# EAGLE board master (EAGLE 8.4.0)
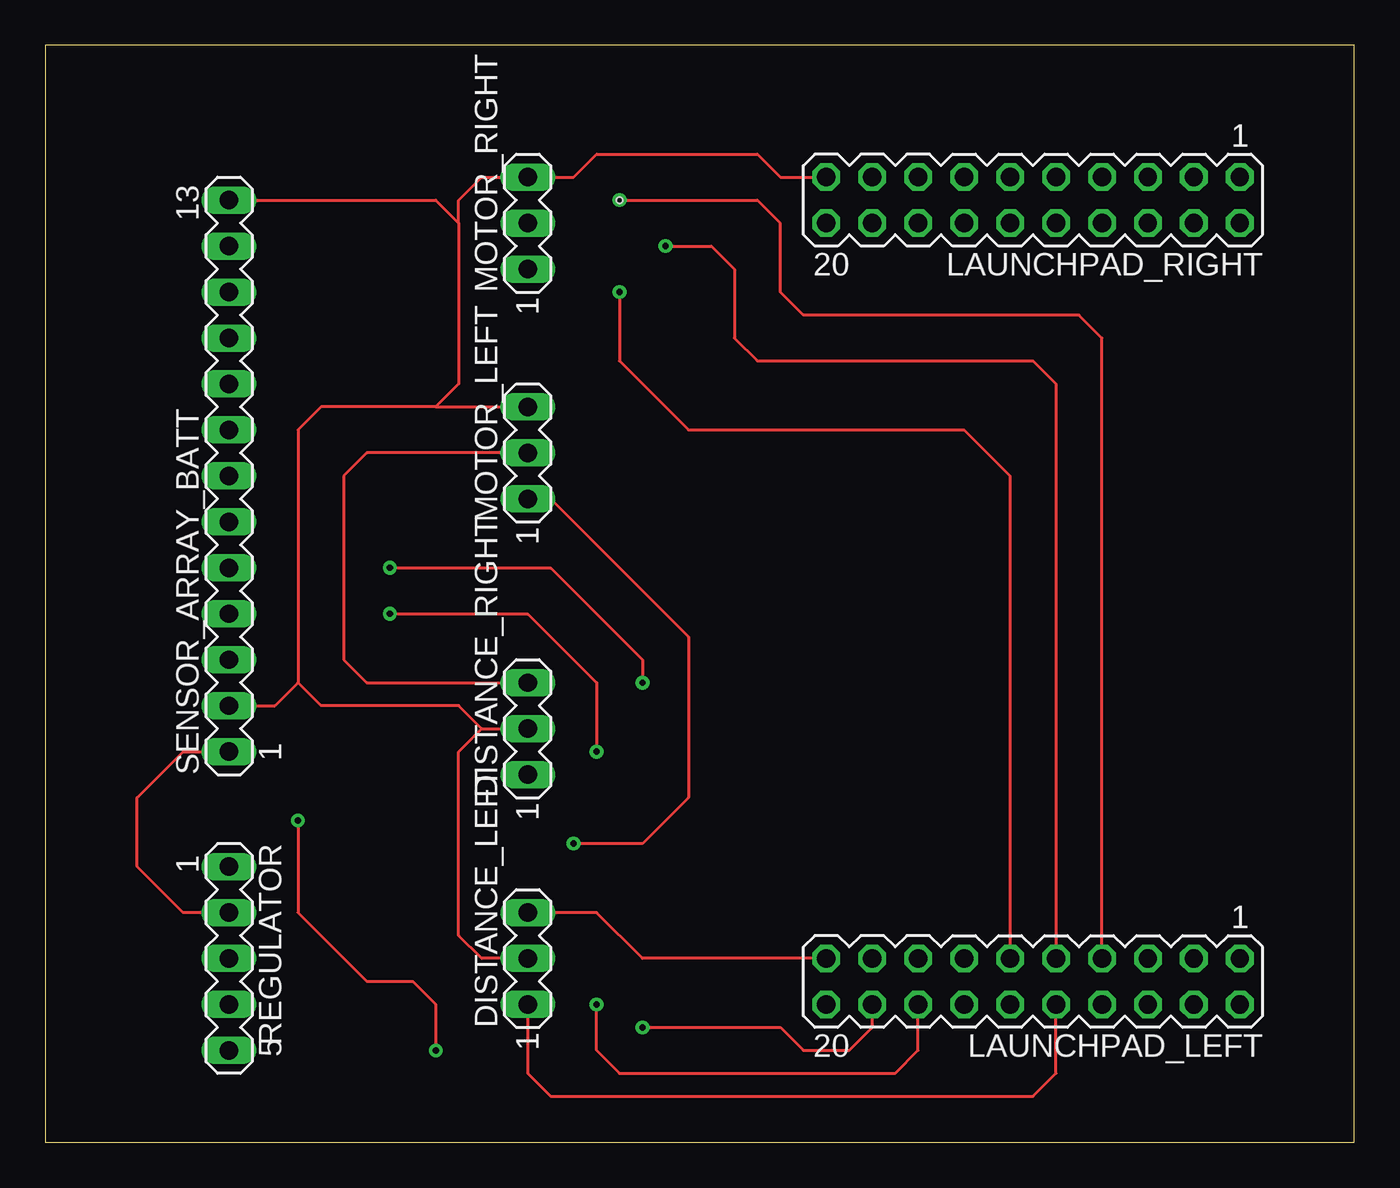
[diagram p0: board, top side]
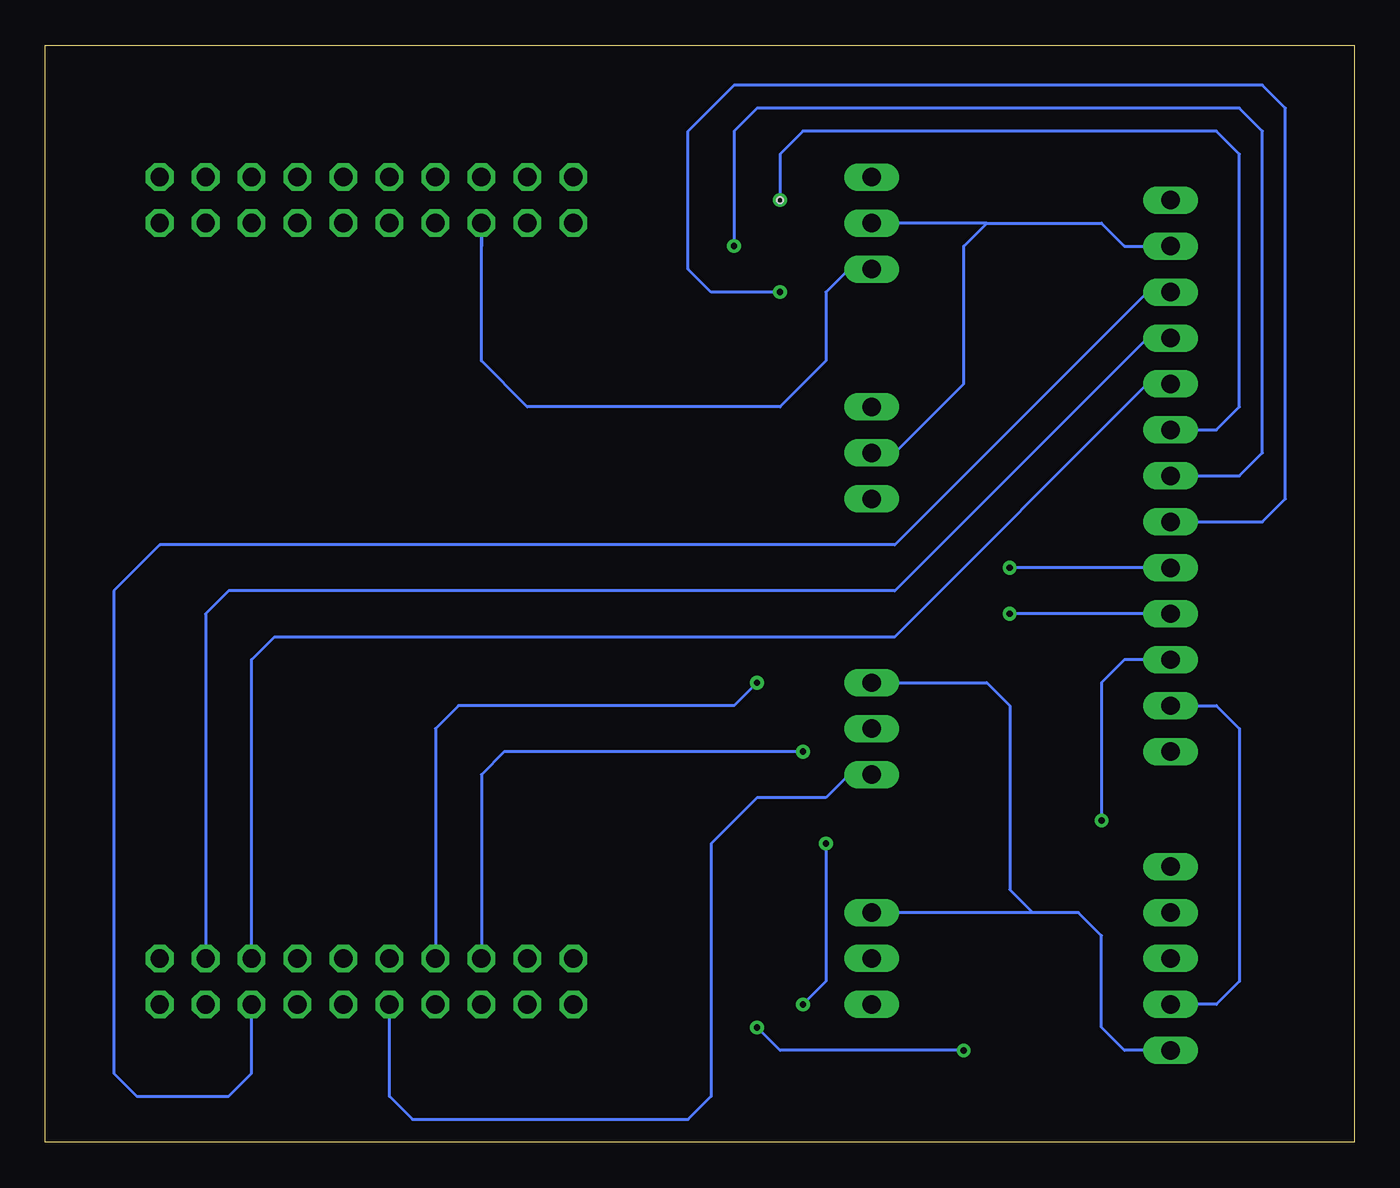
[diagram p1: board, bottom side, seen from below]

Size 72.37 x 60.63 mm. Coordinates in mm from the lower left corner, seen from the top.
Outline: 0,0 72.37,0 72.37,60.63 0,60.63 0,0
Copper layers (1*16): Top 0.035mm / dielectric 1.5mm / Bottom 0.035mm
Design rules "default": minimum track width 6mil, minimum drill 0.35mm, track to track 6mil, track to pad 6mil, pad to pad 6mil, via to via 6mil, smd to smd 6mil, copper to edge 40mil, drill to drill 6mil, minimum pad ring 10mil, minimum via ring 8mil, stop-mask expansion 4mil, vias tented up to drill 0mil, thermal gap 10mil
Holes 0.35 mm at 31.75,52.07

## Footprints (pad centres in the part's own frame; a part is rotated, then mirrored left to right if it is on the bottom)
MA03-1 = drill 1.016 long: 1 -2.54,0; 2 0,0; 3 2.54,0
MA10-2 = drill 1.016 octagon: 1 -11.43,-1.27; 2 -11.43,1.27; 3 -8.89,-1.27; 4 -8.89,1.27; 5 -6.35,-1.27; 6 -6.35,1.27; 7 -3.81,-1.27; 8 -3.81,1.27; 9 -1.27,-1.27; 10 -1.27,1.27; 11 1.27,-1.27; 12 1.27,1.27; 13 3.81,-1.27; 14 3.81,1.27; 15 6.35,-1.27; 16 6.35,1.27; 17 8.89,-1.27; 18 8.89,1.27; 19 11.43,-1.27; 20 11.43,1.27
MA05-1 = drill 1.016 long: 1 -5.08,0; 2 -2.54,0; 3 0,0; 4 2.54,0; 5 5.08,0
MA13-1 = drill 1.016 long: 1 -15.24,0; 2 -12.7,0; 3 -10.16,0; 4 -7.62,0; 5 -5.08,0; 6 -2.54,0; 7 0,0; 8 2.54,0; 9 5.08,0; 10 7.62,0; 11 10.16,0; 12 12.7,0; 13 15.24,0

## Placement (x,y rotation side)
DISTANCE_LEFT  [MA03-1]  26.67,10.16 90 top
DISTANCE_RIGHT  [MA03-1]  26.67,22.86 90 top
LAUNCHPAD_LEFT  [MA10-2]  54.61,8.89 180 top
LAUNCHPAD_RIGHT  [MA10-2]  54.61,52.07 180 top
MOTOR_LEFT  [MA03-1]  26.67,38.1 90 top
MOTOR_RIGHT  [MA03-1]  26.67,50.8 90 top
REGULATOR  [MA05-1]  10.16,10.16 270 top
SENSOR_ARRAY_BATT  [MA13-1]  10.16,36.83 90 top

## Library data of the parts
DISTANCE_LEFT DISTANCE_RIGHT LAUNCHPAD_LEFT LAUNCHPAD_RIGHT MOTOR_LEFT MOTOR_RIGHT REGULATOR = con-lstb; OC_FARNELL: unknown; OC_NEWARK: unknown
SENSOR_ARRAY_BATT = con-lstb; OC_FARNELL: unknown; OC_NEWARK: unknown; SPICEPREFIX: X

## Nets
+3.3V: LAUNCHPAD_LEFT.20
A2: LAUNCHPAD_RIGHT.1
A3: LAUNCHPAD_RIGHT.3
A4: LAUNCHPAD_RIGHT.5
A5: LAUNCHPAD_LEFT.6 SENSOR_ARRAY_BATT.11
A6: LAUNCHPAD_LEFT.4
A7: LAUNCHPAD_LEFT.2
B0: LAUNCHPAD_LEFT.16 MOTOR_LEFT.1
B1: LAUNCHPAD_LEFT.14
B2: LAUNCHPAD_RIGHT.17
B3: LAUNCHPAD_RIGHT.16 MOTOR_RIGHT.1
B4: LAUNCHPAD_LEFT.8
B5: LAUNCHPAD_LEFT.18 SENSOR_ARRAY_BATT.3
B6: LAUNCHPAD_RIGHT.7
B7: LAUNCHPAD_RIGHT.9
BLUE_LED: LAUNCHPAD_RIGHT.20
C4: LAUNCHPAD_RIGHT.14
C5: LAUNCHPAD_RIGHT.12
C6: LAUNCHPAD_RIGHT.10
C7: LAUNCHPAD_RIGHT.8
D0: LAUNCHPAD_LEFT.15 SENSOR_ARRAY_BATT.4
D1: LAUNCHPAD_LEFT.13 SENSOR_ARRAY_BATT.5
D2: LAUNCHPAD_LEFT.11 SENSOR_ARRAY_BATT.6
D3: LAUNCHPAD_LEFT.9 SENSOR_ARRAY_BATT.7
D6: LAUNCHPAD_RIGHT.6
DETECTION: LAUNCHPAD_RIGHT.4
E0: LAUNCHPAD_RIGHT.15
E1: LAUNCHPAD_LEFT.7 SENSOR_ARRAY_BATT.8
E2: LAUNCHPAD_LEFT.5 SENSOR_ARRAY_BATT.9
E3: LAUNCHPAD_LEFT.3 SENSOR_ARRAY_BATT.10
E4: DISTANCE_RIGHT.1 LAUNCHPAD_LEFT.12
E5: DISTANCE_LEFT.1 LAUNCHPAD_LEFT.10
EN: REGULATOR.1
GND: DISTANCE_LEFT.2 DISTANCE_RIGHT.2 LAUNCHPAD_RIGHT.19 MOTOR_LEFT.3 MOTOR_RIGHT.3 REGULATOR.4 SENSOR_ARRAY_BATT.2 SENSOR_ARRAY_BATT.13
GREEN_LED: LAUNCHPAD_RIGHT.18
PUSH1: LAUNCHPAD_RIGHT.2
PUSH2: LAUNCHPAD_RIGHT.13
RED_LED: LAUNCHPAD_LEFT.1
RESET: LAUNCHPAD_RIGHT.11
VBUS: DISTANCE_LEFT.3 DISTANCE_RIGHT.3 LAUNCHPAD_LEFT.19 MOTOR_LEFT.2 MOTOR_RIGHT.2 REGULATOR.5 SENSOR_ARRAY_BATT.12
VCC: REGULATOR.2 SENSOR_ARRAY_BATT.1

## Tracks (layer width: path | path; a pad name or v marks a point on that pad's centre or on a via)
A5
  Bottom 0.152: SENSOR_ARRAY_BATT.11 11.43,46.99 25.4,33.02 66.04,33.02 68.58,30.48 68.58,3.81 67.31,2.54 62.23,2.54 60.96,3.81 LAUNCHPAD_LEFT.6
B0  (via drill 0.35)
  Top 0.152: MOTOR_LEFT.1 27.94,35.56 35.56,27.94 35.56,19.05 33.02,16.51 v29.21,16.51 | v30.48,7.62 30.48,5.08 31.75,3.81 46.99,3.81 48.26,5.08 LAUNCHPAD_LEFT.16
  Bottom 0.152: v29.21,16.51 29.21,8.89 v30.48,7.62
B3
  Bottom 0.152: 48.26,49.53 LAUNCHPAD_RIGHT.16 48.26,43.18 45.72,40.64 31.75,40.64 29.21,43.18 29.21,46.99 27.94,48.26 MOTOR_RIGHT.1
B5  (via drill 0.35)
  Top 0.152: v21.59,5.08 21.59,7.62 20.32,8.89 17.78,8.89 13.97,12.7 v13.97,17.78 | v33.02,6.35 40.64,6.35 41.91,5.08 44.45,5.08 45.72,6.35 LAUNCHPAD_LEFT.18
  Bottom 0.152: 11.43,26.67 SENSOR_ARRAY_BATT.3 12.7,26.67 13.97,25.4 v13.97,17.78 | v21.59,5.08 31.75,5.08 v33.02,6.35
D0  (via drill 0.35)
  Top 0.152: v19.05,29.21 26.67,29.21 30.48,25.4 v30.48,21.59
  Bottom 0.152: SENSOR_ARRAY_BATT.4 v19.05,29.21 | v30.48,21.59 46.99,21.59 48.26,20.32 LAUNCHPAD_LEFT.15
D1  (via drill 0.35)
  Top 0.152: v19.05,31.75 27.94,31.75 33.02,26.67 v33.02,25.4
  Bottom 0.152: SENSOR_ARRAY_BATT.5 v19.05,31.75 | v33.02,25.4 34.29,24.13 49.53,24.13 50.8,22.86 LAUNCHPAD_LEFT.13
D2  (via drill 0.35)
  Top 0.152: LAUNCHPAD_LEFT.11 53.34,36.83 50.8,39.37 35.56,39.37 31.75,43.18 v31.75,46.99
  Bottom 0.152: SENSOR_ARRAY_BATT.6 5.08,34.29 3.81,35.56 3.81,57.15 5.08,58.42 34.29,58.42 36.83,55.88 36.83,48.26 35.56,46.99 v31.75,46.99
D3  (via drill 0.35)
  Top 0.152: LAUNCHPAD_LEFT.9 55.88,41.91 54.61,43.18 39.37,43.18 38.1,44.45 38.1,48.26 36.83,49.53 v34.29,49.53
  Bottom 0.152: SENSOR_ARRAY_BATT.7 6.35,36.83 5.08,38.1 5.08,55.88 6.35,57.15 33.02,57.15 34.29,55.88 v34.29,49.53
E1  (via drill 0.35)
  Top 0.152: v31.75,52.07 39.37,52.07 40.64,50.8 40.64,46.99 41.91,45.72 57.15,45.72 58.42,44.45 LAUNCHPAD_LEFT.7
  Bottom 0.152: v31.75,52.07 31.75,54.61 30.48,55.88 7.62,55.88 6.35,54.61 6.35,40.64 7.62,39.37 SENSOR_ARRAY_BATT.8
E2
  Bottom 0.152: SENSOR_ARRAY_BATT.9 11.43,41.91 25.4,27.94 59.69,27.94 60.96,26.67 LAUNCHPAD_LEFT.5
E3
  Bottom 0.152: LAUNCHPAD_LEFT.3 63.5,29.21 62.23,30.48 25.4,30.48 11.43,44.45 SENSOR_ARRAY_BATT.10
E4
  Bottom 0.152: DISTANCE_RIGHT.1 27.94,20.32 29.21,19.05 33.02,19.05 35.56,16.51 35.56,2.54 36.83,1.27 52.07,1.27 53.34,2.54 LAUNCHPAD_LEFT.12
E5
  Top 0.152: DISTANCE_LEFT.1 26.67,3.81 27.94,2.54 54.61,2.54 55.88,3.81 LAUNCHPAD_LEFT.10
GND
  Top 0.152: SENSOR_ARRAY_BATT.2 12.7,24.13 13.97,25.4 | 13.97,25.4 13.97,39.37 15.24,40.64 21.59,40.64 | 21.59,40.64 MOTOR_LEFT.3 | 22.86,50.8 22.86,52.07 24.13,53.34 MOTOR_RIGHT.3 29.21,53.34 30.48,54.61 39.37,54.61 40.64,53.34 LAUNCHPAD_RIGHT.19 | 22.86,50.8 22.86,41.91 21.59,40.64 | 13.97,25.4 15.24,24.13 22.86,24.13 24.13,22.86 | DISTANCE_LEFT.2 24.13,10.16 22.86,11.43 22.86,21.59 24.13,22.86 | 22.86,50.8 21.59,52.07 SENSOR_ARRAY_BATT.13 | 24.13,22.86 DISTANCE_RIGHT.2
  Bottom 0.152: 8.89,24.13 SENSOR_ARRAY_BATT.2 7.62,24.13 6.35,22.86 6.35,8.89 7.62,7.62 REGULATOR.4
VBUS
  Top 0.152: LAUNCHPAD_LEFT.19 33.02,10.16 30.48,12.7 DISTANCE_LEFT.3 | MOTOR_LEFT.2 17.78,38.1 16.51,36.83 16.51,26.67 17.78,25.4 DISTANCE_RIGHT.3
  Bottom 0.152: REGULATOR.5 12.7,5.08 13.97,6.35 13.97,11.43 15.24,12.7 17.78,12.7 | 17.78,12.7 DISTANCE_LEFT.3 | 20.32,50.8 MOTOR_RIGHT.2 | 20.32,50.8 13.97,50.8 12.7,49.53 SENSOR_ARRAY_BATT.12 | 17.78,12.7 19.05,13.97 19.05,24.13 20.32,25.4 DISTANCE_RIGHT.3 | MOTOR_LEFT.2 25.4,38.1 21.59,41.91 21.59,49.53 20.32,50.8
VCC
  Top 0.152: 8.89,12.7 REGULATOR.2 7.62,12.7 5.08,15.24 5.08,19.05 7.62,21.59 SENSOR_ARRAY_BATT.1